# EAGLE board piHatJoystick (EAGLE 9.5.1)
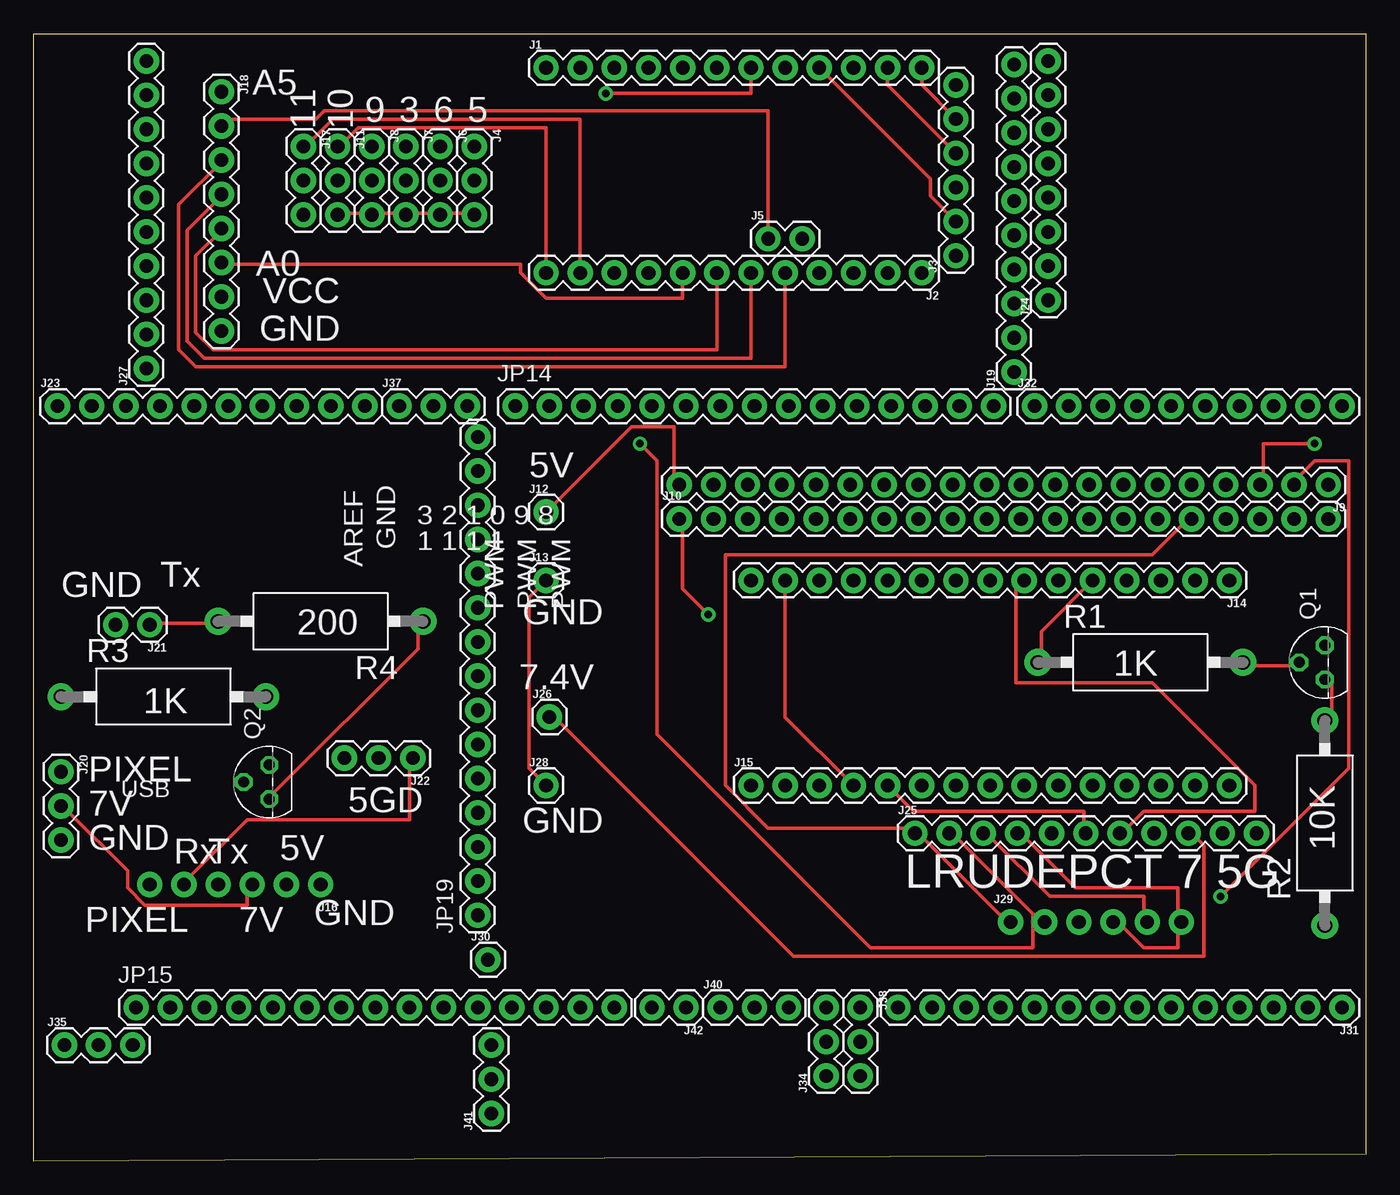
[diagram p0: board, top side]
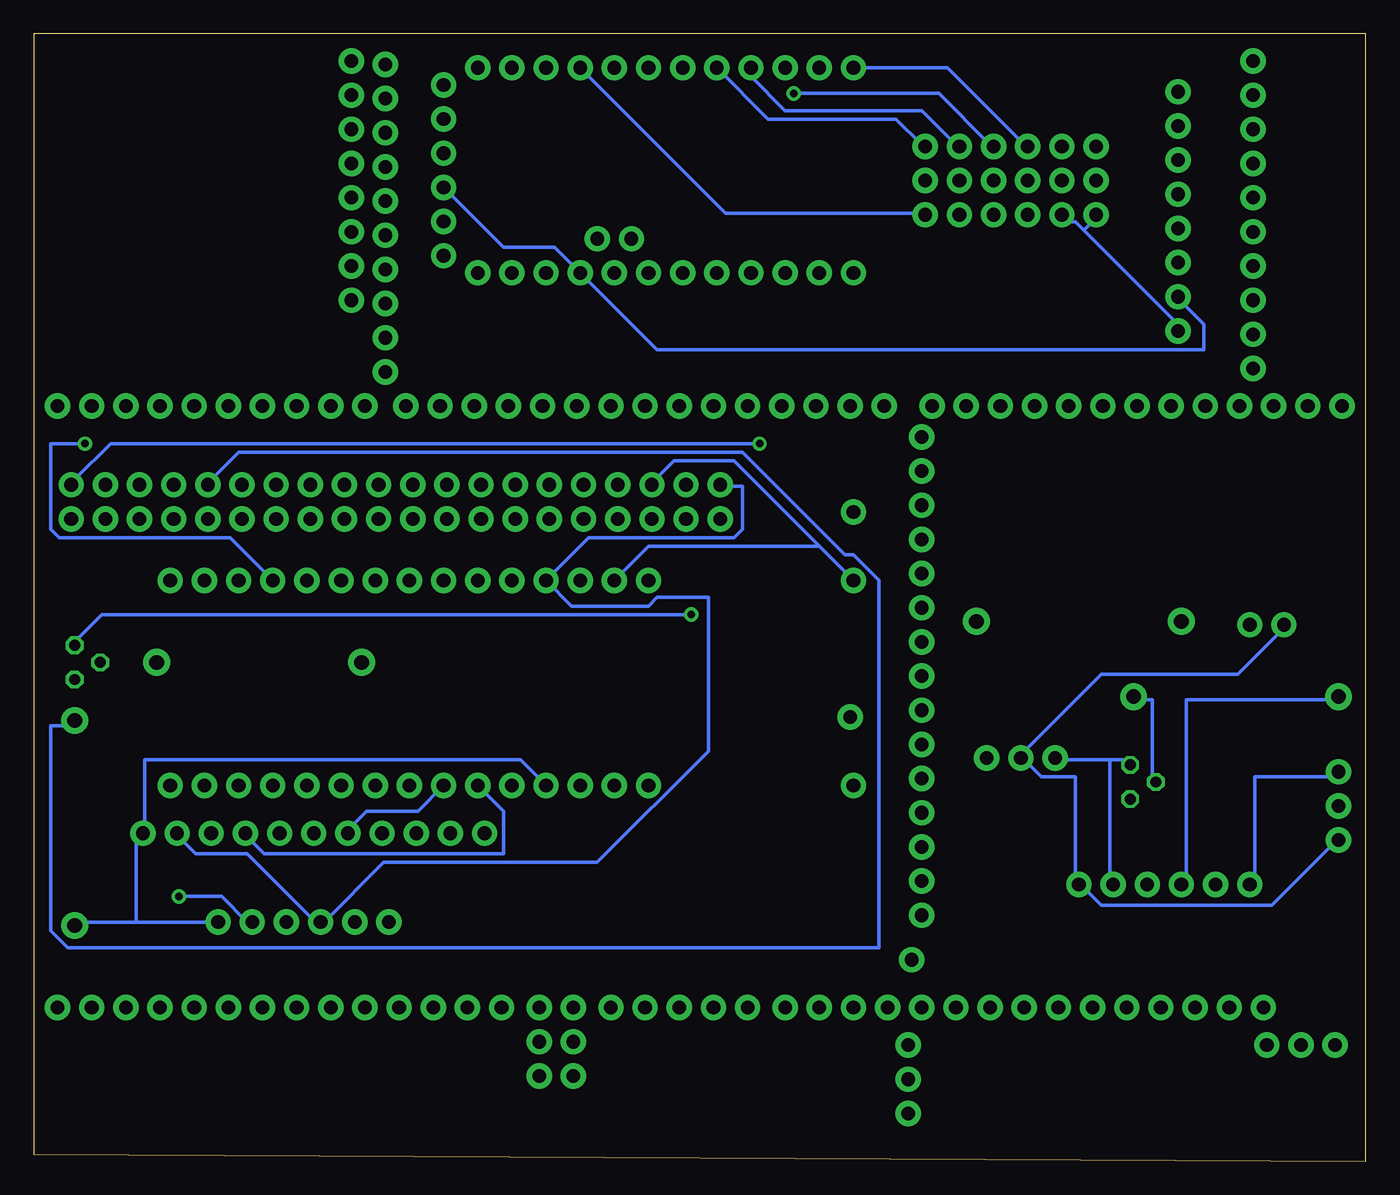
[diagram p1: board, bottom side, seen from below]

Size 99.06 x 83.82 mm. Coordinates in mm from the lower left corner, seen from the top.
Outline: 0,83.82 99.06,83.82 99.06,0.51 0,0 0,83.82
Copper layers (1*16): Top 0.035mm / dielectric 1.5mm / Bottom 0.035mm
Design rules "default": minimum track width 10mil, minimum drill 22mil, track to track 10mil, track to pad 10mil, pad to pad 10mil, via to via 16mil, smd to smd 8mil, copper to edge 30mil, drill to drill 12mil, minimum pad ring 10mil, minimum via ring 10mil, stop-mask expansion 4mil, vias tented up to drill 0mil, thermal gap 10mil
Net classes: 0 default: width 0.254 mm, clearance 0.254 mm; 1 power: width 0.61 mm, drill 0.711 mm, clearance 0.33 mm; 2 gnd: width 0.305 mm, drill 0.711 mm, clearance 0.254 mm; 3 usbvcc: width 0.508 mm, drill 0.711 mm, clearance 0.254 mm; 4 aref: width 0.406 mm
vRestrict: area 25.4,45.5 to 27.1,49.1; area 33.4,41 to 34.9,44.6; area 35.9,41 to 37.5,44.6; area 38.5,41 to 40,44.6; area 42.5,38.6 to 43.1,38.9

## Footprints (pad centres in the part's own frame; a part is rotated, then mirrored left to right if it is on the bottom)
1X12 = drill 1.016 pad 1.88: 1 0,0; 2 2.54,0; 3 5.08,0; 4 7.62,0; 5 10.16,0; 6 12.7,0; 7 15.24,0; 8 17.78,0; 9 20.32,0; 10 22.86,0; 11 25.4,0; 12 27.94,0
1X06 = drill 1.016 pad 1.88: 1 0,0; 2 2.54,0; 3 5.08,0; 4 7.62,0; 5 10.16,0; 6 12.7,0
1X03 = drill 1.016 pad 1.88: 1 0,0; 2 2.54,0; 3 5.08,0
1X02 = drill 1.016 pad 1.88: 1 0,0; 2 2.54,0
1X20 = drill 1.016 pad 1.88: 1 0,0; 2 2.54,0; 3 5.08,0; 4 7.62,0; 5 10.16,0; 6 12.7,0; 7 15.24,0; 8 17.78,0; 9 20.32,0; 10 22.86,0; 11 25.4,0; 12 27.94,0; 13 30.48,0; 14 33.02,0; 15 35.56,0; 16 38.1,0; 17 40.64,0; 18 43.18,0; 19 45.72,0; 20 48.26,0
1X01 = drill 1.016 pad 1.88: 1 0,0
1X15 = drill 1.016 pad 1.88: 1 0,0; 2 2.54,0; 3 5.08,0; 4 7.62,0; 5 10.16,0; 6 12.7,0; 7 15.24,0; 8 17.78,0; 9 20.32,0; 10 22.86,0; 11 25.4,0; 12 27.94,0; 13 30.48,0; 14 33.02,0; 15 35.56,0
1X06_NO_SILK = drill 1.016 pad 1.88: 1 0,0; 2 2.54,0; 3 5.08,0; 4 7.62,0; 5 10.16,0; 6 12.7,0
1X08 = drill 1.016 pad 1.88: 1 0,0; 2 2.54,0; 3 5.08,0; 4 7.62,0; 5 10.16,0; 6 12.7,0; 7 15.24,0; 8 17.78,0
1X10 = drill 1.016 pad 1.88: 1 0,0; 2 2.54,0; 3 5.08,0; 4 7.62,0; 5 10.16,0; 6 12.7,0; 7 15.24,0; 8 17.78,0; 9 20.32,0; 10 22.86,0
1X11 = drill 1.016 pad 1.88: 1 0,0; 2 2.54,0; 3 5.08,0; 4 7.62,0; 5 10.16,0; 6 12.7,0; 7 15.24,0; 8 17.78,0; 9 20.32,0; 10 22.86,0; 11 25.4,0
1X14 = drill 1.016 pad 1.88: 1 0,0; 2 2.54,0; 3 5.08,0; 4 7.62,0; 5 10.16,0; 6 12.7,0; 7 15.24,0; 8 17.78,0; 9 20.32,0; 10 22.86,0; 11 25.4,0; 12 27.94,0; 13 30.48,0; 14 33.02,0
1X15@1 = drill 1.016 pad 1.88: 1 0,0; 2 2.54,0; 3 5.08,0; 4 7.62,0; 5 10.16,0; 6 12.7,0; 7 15.24,0; 8 17.78,0; 9 20.32,0; 10 22.86,0; 11 25.4,0; 12 27.94,0; 13 30.48,0; 14 33.02,0; 15 35.56,0
TO92 = drill 0.813 octagon: 1 1.27,0; 2 0,1.905; 3 -1.27,0
CA0001 = drill 1.1 pad 2: 1 -7.62,0; 2 7.62,0

## Placement (x,y rotation side)
J1  [1X12]  38.1,81.28 0 top
J2  [1X12]  66.04,66.04 180 top
J3  [1X06]  68.58,67.31 90 top
J4  Pixel  [1X03]  32.77,75.44 270 top
J5  [1X02]  54.61,68.58 0 top
J6  Pixel  [1X03]  30.23,75.44 270 top
J7  Pixel  [1X03]  27.69,75.44 270 top
J8  Pixel  [1X03]  25.15,75.44 270 top
J9  [1X20]  96.27,50.29 180 top
J10  [1X20]  48.01,47.75 0 top
J11  Pixel  [1X03]  22.61,75.44 270 top
J12  [1X01]  38.1,48.26 0 top
J13  [1X01]  38.1,43.18 0 top
J14  [1X15]  88.9,43.18 180 top
J15  [1X15]  53.34,27.94 0 top
J16  [1X06_NO_SILK]  21.34,20.57 180 top
J17  Pixel  [1X03]  20.07,75.44 270 top
J18  [1X08]  13.97,79.5 270 top
J19  [1X10]  72.9,58.67 90 top
J20  Pixel  [1X03]  2.03,28.96 270 top
J21  [1X02]  8.64,39.88 180 top
J22  IR Rx  [1X03]  28.19,29.97 180 top
J23  [1X10]  1.78,56.13 0 top
J24  [1X08]  75.44,64.01 90 top
J25  [1X11]  65.53,24.38 0 top
J26  [1X01]  38.35,33.02 0 top
J27  [1X10]  8.38,58.93 90 top
J28  [1X01]  38.1,27.94 0 top
J29  [1X06_NO_SILK]  72.64,17.78 0 top
J30  [1X01]  33.78,14.99 0 top
J31  [1X14]  97.28,11.43 180 top
J32  [1X10]  74.42,56.13 0 top
J34  [1X03]  58.93,6.35 90 top
J35  [1X03]  2.29,8.64 0 top
J37  [1X03]  27.18,56.13 0 top
J38  [1X03]  61.47,11.43 270 top
J40  [1X03]  51.05,11.43 0 top
J41  [1X03]  34.04,3.56 90 top
J42  [1X02]  48.51,11.43 180 top
JP14  [1X15@1]  35.81,56.13 0 top
JP15  [1X15@1]  7.62,11.43 0 top
JP19  [1X15@1]  33.02,18.29 90 top
Q1  2N5088  [TO92]  96.01,37.08 90 top
Q2  2N5088  [TO92]  17.53,28.19 90 top
R1  1K  [CA0001]  82.3,37.08 0 top
R2  10K  [CA0001]  96.01,25.15 90 top
R3  1K  [CA0001]  9.65,34.54 0 top
R4  200ohm  [CA0001]  21.34,40.13 180 top

## Library data of the parts
J1 J2 J5 J9 J10 J12-J15 J21 J25 J26 J28 J30 J31 J34 J35 J37 J38 J40-J42 JP14 JP15 JP19 = SparkFun-Connectors
J3 J16 J29 = SparkFun-Connectors; PROD_ID: CONN-08437
J4 J6-J8 J11 J17 J20 J22 = SparkFun-Connectors; PROD_ID: XXX-00000
J18 J24 = SparkFun-Connectors; PROD_ID: CONN-08438
J19 J23 J27 J32 = SparkFun-Connectors; PROD_ID: CONN-11563
Q1 Q2 = transistor-npn
R1-R4 = resistor-power; OC_FARNELL: unknown; OC_NEWARK: unknown

## Nets
3.3V_B: J10.1 Q1.1
5V_C: J16.2 J22.3 Q2.1
7.4V_C: J16.3 J20.2
7V_B: J25.9 J26.1
A0_E: J2.8 J18.6
A1_B: J14.5 R1.1
A1_E: J2.7 J18.5
A2_E: J2.6 J18.4
A3_E: J2.5 J18.3
A4_E: J5.1 J18.2
A5_E: J18.1
D0_E: J1.11 J3.4
D1_E: J1.12 J3.5
D2_B: J15.5 J25.6
D3_B: J15.6 J25.8
D3_E: J1.7 J7.1
D4_B: J15.7 J25.5
D5_E: J1.5 J4.1
D6_E: J1.4 J6.1
D9_E: J1.1 J8.1
D10_E: J2.12 J11.1
D11_E: J2.11 J17.1
GND_B: J9.18 J13.1 J14.14 J15.4 J25.4 J25.11 J28.1 J29.4 J29.6 R2.1
GND_C: J16.1 J20.3 J21.2 J22.2
GND_E: J1.9 J3.2 J4.3 J6.3 J7.3 J8.3 J11.3 J17.3 J18.8
GPIO5: J10.16 J25.1 J29.1
GPIO6: J10.17
GPIO12: J9.5 Q1.3 R2.2
GPIO13: J10.18
GPIO16: J9.3 J14.4
GPIO19: J10.19
GPIO20: J9.2 J25.3 J29.5
GPIO21: J9.1 J25.2 J29.2
GPIO26: J10.20
IRRX_B: J14.7 J25.7
N$1: Q1.2 R1.2
N$2: Q2.2 R3.2
N$4: Q2.3 R4.1
PIXEL_C: J16.6 J20.1
RXIR_C: J16.5 J22.1
TX_C: J21.1 R4.2
TXIR_C: J16.4 R3.1
VCC_B: J9.20 J12.1 J14.12 J25.10 J29.3
VCC_E: J2.4 J3.3 J18.7

## Tracks (layer width: path | path; a pad name or v marks a point on that pad's centre or on a via)
3.3V_B  (via drill 0.56)
  Top 0.254: v50.16,40.64 48.26,42.55 48.26,47.62 J10.1
  Bottom 0.254: v50.16,40.64 93.98,40.64 95.89,38.73 Q1.1
5V_C
  Bottom 0.254: 19.05,29.84 22.86,29.84 J22.3 | 19.05,29.84 17.78,29.84 Q2.1 | 19.05,29.84 19.05,20.95 J16.2
7.4V_C
  Top 0.254: J20.2 2.54,26.04 6.99,21.59 6.99,20.32 8.26,19.05 15.88,19.05 15.88,20.32 J16.3
7V_B
  Top 0.254: J26.1 38.73,33.02 56.52,15.24 87,15.24 87,23.5 86.36,24.13 J25.9
A0_E
  Top 0.254: J2.8 48.26,64.14 38.1,64.14 36.2,66.04 36.2,66.67 13.97,66.67 J18.6
A1_B
  Top 0.254: J14.5 74.93,39.37 74.93,37.47 R1.1
A1_E
  Top 0.254: J2.7 50.8,60.33 13.34,60.33 12.06,61.59 12.06,67.31 13.97,69.22 J18.5
A2_E
  Top 0.254: J2.6 53.34,59.69 12.7,59.69 11.43,60.96 11.43,69.22 13.97,71.75 J18.4
A3_E
  Top 0.254: J2.5 55.88,59.05 12.06,59.05 10.79,60.33 10.79,71.12 13.97,74.3 J18.3
A4_E
  Top 0.254: J5.1 54.61,78.11 21.59,78.11 20.95,77.47 13.97,77.47 J18.2
D0_E
  Top 0.254: J3.4 63.5,80.01 J1.11
D1_E
  Top 0.254: J3.5 66.04,80.01 J1.12
D2_B
  Top 0.254: J15.5 65.41,26.04 78.11,26.04 78.11,24.77 J25.6
D3_B
  Bottom 0.254: J15.6 64.14,26.04 64.14,22.86 81.92,22.86 83.19,24.13 J25.8
D3_E  (via drill 0.56)
  Top 0.254: v42.55,79.38 53.34,79.38 J1.7
  Bottom 0.254: v42.55,79.38 31.75,79.38 27.94,75.56 J7.1
D4_B
  Bottom 0.254: J15.7 70.48,26.04 74.3,26.04 75.56,24.77 J25.5
D5_E
  Bottom 0.254: J1.5 44.45,77.47 34.92,77.47 33.02,75.56 J4.1
D6_E
  Bottom 0.254: J1.4 45.72,80.64 43.18,78.11 33.02,78.11 30.48,75.56 J6.1
D9_E
  Bottom 0.254: J1.1 31.11,81.28 25.4,75.56 J8.1
D10_E
  Top 0.254: J2.12 38.1,76.83 24.13,76.83 22.86,75.56 J11.1
D11_E
  Top 0.254: J2.11 40.64,77.47 22.23,77.47 20.32,75.56 J17.1
GND_B
  Top 0.254: 85.09,17.78 85.09,15.88 82.55,15.88 80.64,17.78 J29.4 | 85.09,17.78 85.09,20.32 77.47,20.32 73.66,24.13 J25.4 | 85.09,17.78 J29.6 | J28.1 36.83,29.21 36.83,41.91 J13.1 | J15.4 55.88,33.02 J14.14
  Bottom 0.254: 91.44,17.78 91.44,24.13 J25.11 90.81,24.77 90.81,29.84 62.87,29.84 J15.4 | 91.44,17.78 95.89,17.78 R2.1 | J29.6 91.44,17.78 | J13.1 40.64,45.72 | 40.64,45.72 46.99,52.07 51.44,52.07 52.7,50.8 J9.18 | J14.14 53.34,45.72 40.64,45.72
GND_C
  Bottom 0.254: J20.3 2.54,23.5 6.99,19.05 19.68,19.05 20.95,20.32 J16.1 21.59,20.95 21.59,28.57 24.13,28.57 25.4,29.84 J22.2 25.4,30.48 19.68,36.2 9.53,36.2 6.35,39.37 J21.2
GND_E
  Top 0.254: J1.9 66.67,73.03 66.67,71.75 J3.2 | J4.3 32.38,70.48 30.48,70.48 J6.3 29.84,70.48 27.94,70.48 J7.3 27.3,70.48 25.4,70.48 J8.3 24.77,70.48 22.86,70.48 J11.3
  Bottom 0.254: 20.95,69.22 21.59,69.85 22.23,69.85 J11.3 | 20.95,69.22 13.97,62.23 J18.8 | 20.95,69.22 20.32,69.85 J17.3 | J1.9 47.62,70.48 33.02,70.48 J4.3
GPIO5
  Top 0.254: J29.1 72.39,17.78 66.04,24.13 J25.1 65.41,24.77 54.61,24.77 51.44,27.94 51.44,45.09 83.19,45.09 85.72,47.62 J10.16
GPIO12
  Top 0.254: Q1.3 96.52,35.56 96.52,33.02 R2.2
  Bottom 0.254: J9.5 85.72,50.8 83.82,52.7 46.35,52.7 38.73,45.09 38.1,45.09 36.2,43.18 36.2,15.88 96.52,15.88 97.79,17.14 97.79,32.38 96.52,32.38 R2.2
GPIO16  (via drill 0.56)
  Top 0.254: v95.25,53.34 91.44,53.34 91.44,50.8 J9.3
  Bottom 0.254: J14.4 84.45,46.35 97.16,46.35 97.79,46.99 97.79,53.34 v95.25,53.34
GPIO20  (via drill 0.56)
  Top 0.254: J25.3 71.12,24.13 75.56,19.68 82.55,19.68 82.55,17.78 J29.5 | v88.27,19.68 97.79,29.21 97.79,52.07 95.25,52.07 93.98,50.8 J9.2
  Bottom 0.254: v88.27,19.68 85.09,19.68 83.19,17.78 J29.5
GPIO21  (via drill 0.56)
  Top 0.254: 74.3,18.41 74.93,17.78 J29.2 | 74.3,18.41 68.58,24.13 J25.2 | v45.09,53.34 46.35,52.07 46.35,31.75 62.23,15.88 74.3,15.88 74.3,18.41
  Bottom 0.254: v45.09,53.34 93.34,53.34 95.89,50.8 J9.1
IRRX_B
  Top 0.254: J14.7 73.03,42.55 73.03,35.56 83.19,35.56 90.81,27.94 90.81,26.04 82.55,26.04 81.28,24.77 J25.7
N$1
  Top 0.254: Q1.2 93.98,36.83 90.17,36.83 R1.2
N$2
  Bottom 0.254: Q2.2 15.88,28.57 15.88,34.29 17.14,34.29 R3.2
N$4
  Top 0.254: Q2.3 17.78,27.3 28.57,38.1 28.57,40.01 R4.1
PIXEL_C
  Bottom 0.254: J16.6 8.26,20.95 8.26,28.57 2.54,28.57 J20.1
RXIR_C
  Top 0.254: J16.5 11.43,20.95 15.88,25.4 27.94,25.4 27.94,29.84 J22.1
TX_C
  Top 0.254: J21.1 8.89,40.01 13.34,40.01 R4.2
TXIR_C
  Bottom 0.254: J16.4 13.34,20.95 13.34,34.29 2.54,34.29 R3.1
VCC_B
  Top 0.254: J12.1 44.45,54.61 47.62,54.61 47.62,50.8 J9.20
  Bottom 0.254: J25.10 88.27,24.13 87,22.86 83.19,22.86 78.11,17.78 J29.3 77.47,17.78 73.03,22.23 57.15,22.23 48.9,30.48 48.9,41.91 52.7,41.91 53.34,41.27 59.05,41.27 J14.12 57.78,46.35 46.99,46.35 46.35,46.99 46.35,50.16 47.62,50.16 J9.20
VCC_E
  Bottom 0.254: J18.7 13.97,64.14 12.06,62.23 12.06,60.33 52.7,60.33 J2.4 60.33,67.94 64.14,67.94 J3.3

## Text on the board
tNames: 3 2 1 0 9 8 | GND | 1 1 1 1 | AREF | PWM | PWM | PWM | USB
Reference: C8 | C2 | R11 | C4 | C5
_tsilk: 11 | 10 | A5 | 9 | 3 | 6 | 5 | A0 | VCC | GND | 5V | Tx | GND | GND | 200 | 1K | 7.4V | 1K | PIXEL | 7V | 5GD | GND | GND | 10K | Rx | Tx | 5V | LRUDEPCT 7 5G | GND | PIXEL | 7V